# EAGLE board picopter_tx (EAGLE 6.5.0)
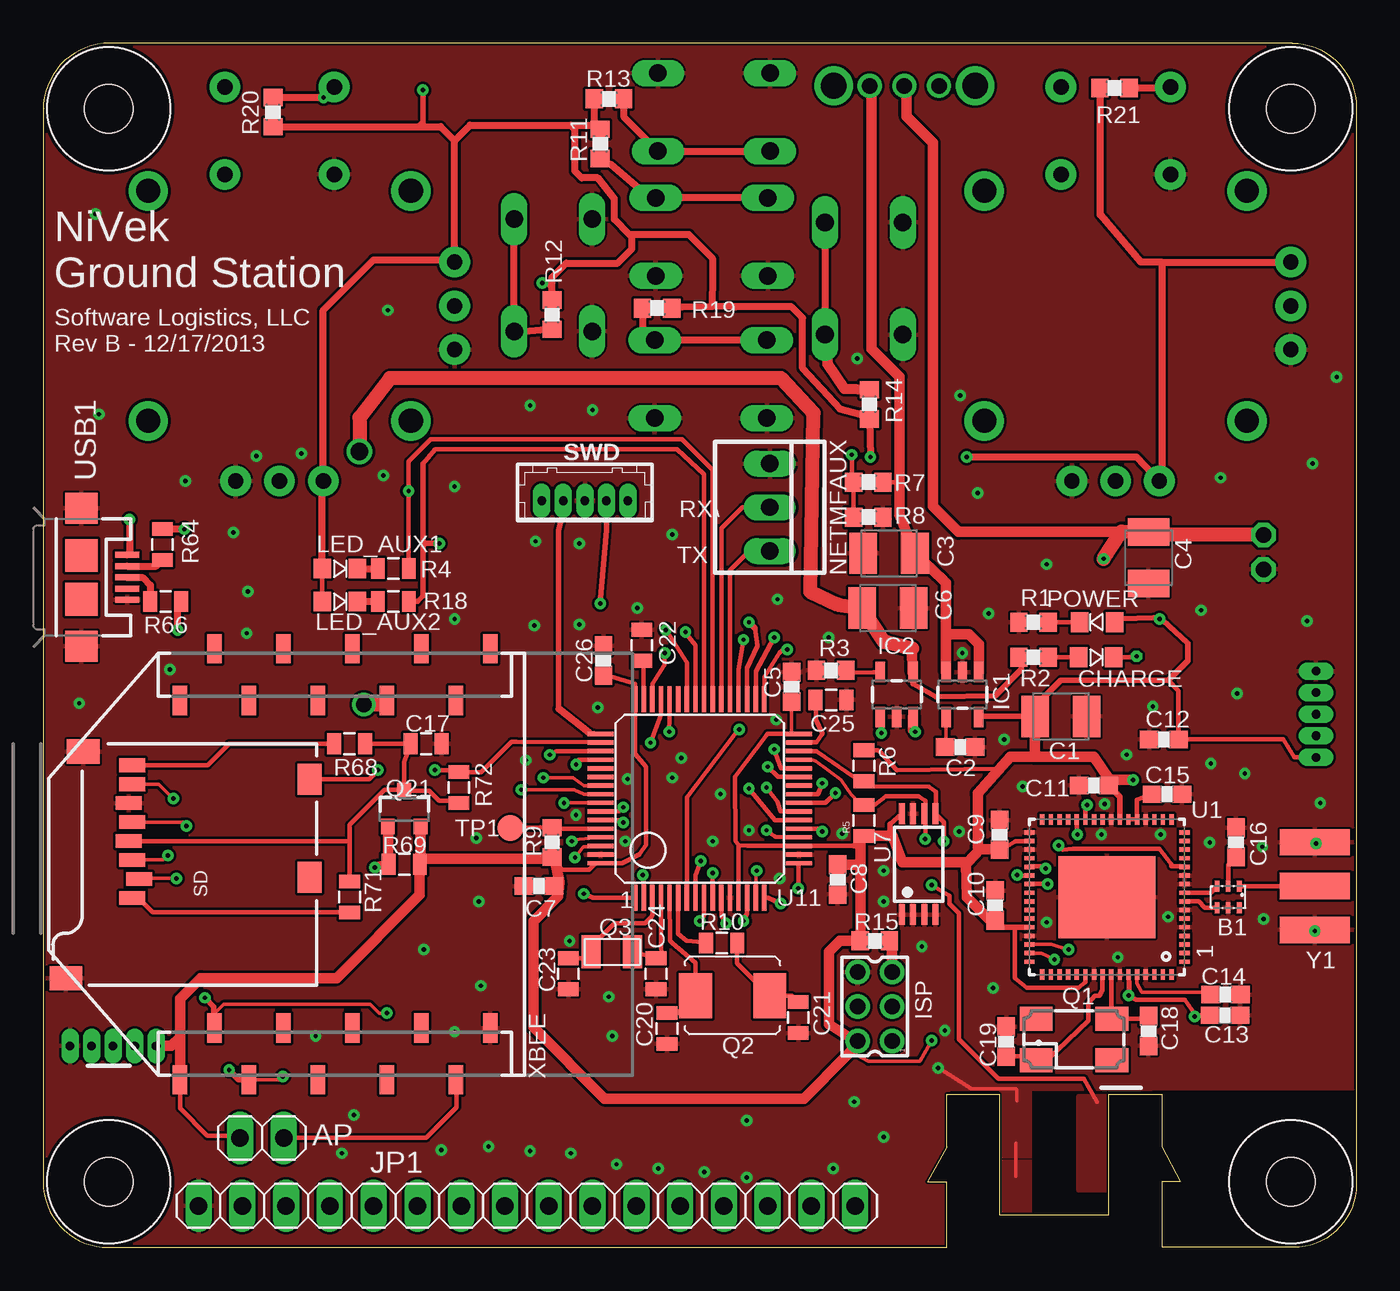
[diagram p0: board, top side]
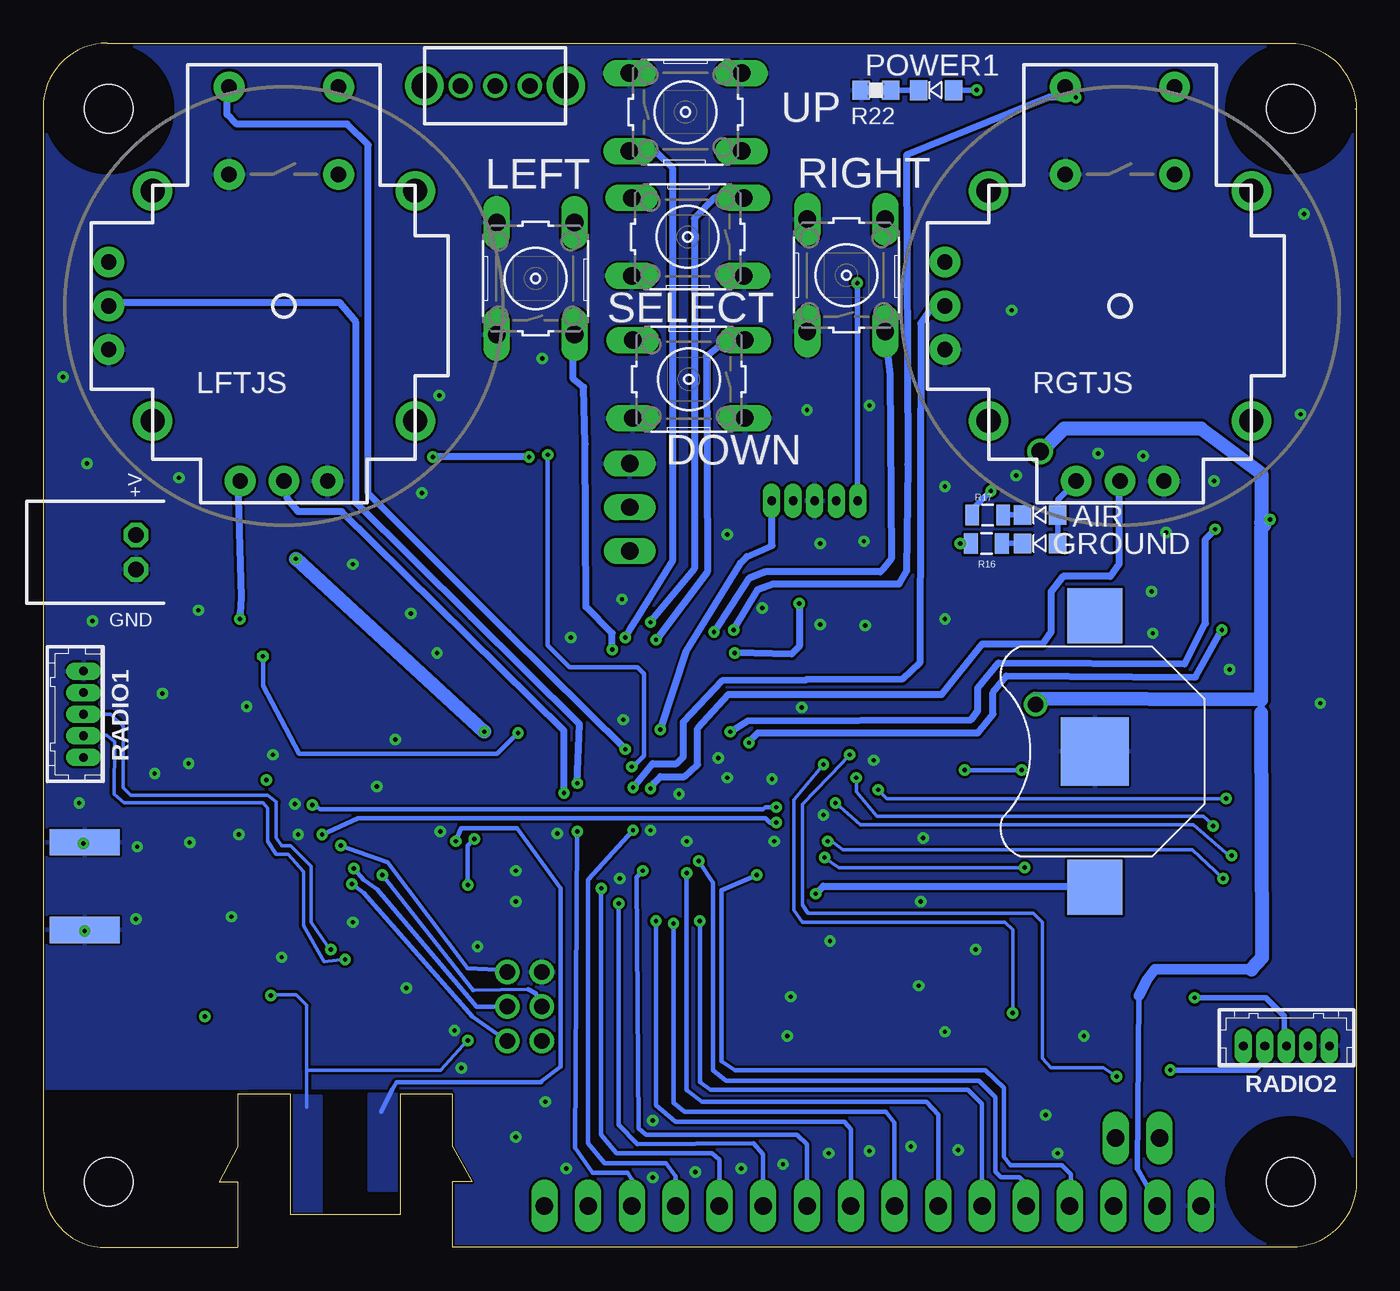
[diagram p1: board, bottom side, seen from below]

Size 76.2 x 69.85 mm. Coordinates in mm from the lower left corner, seen from the top.
Outline: 0,3.79 arc90 3.79,0 52.45,0 52.45,3.81 51.31,3.81 52.45,5.84 52.45,8.89 55.5,8.89 55.5,1.91 61.85,1.91 61.85,8.89 64.9,8.89 64.9,5.84 65.98,3.81 64.91,3.81 64.91,0 72.56,0 arc90 76.2,3.64 76.2,66.12 arc90 72.47,69.85 3.86,69.85 arc90 0,65.99
Outline: 0.06,66.04 0,66.04 0,3.68
Copper layers (1*16): Top 0.035mm / dielectric 1.5mm / Bottom 0.035mm
Design rules "default *": minimum track width 8mil, minimum drill 1mil, track to track 6mil, track to pad 6mil, pad to pad 6mil, via to via 6mil, smd to smd 0mil, copper to edge 5mil, drill to drill 8mil, minimum pad ring 10mil, minimum via ring 8mil, stop-mask expansion 4mil, vias tented up to drill 11mil, thermal gap 5mil
tRestrict: 5 lines

## Footprints (pad centres in the part's own frame; a part is rotated, then mirrored left to right if it is on the bottom)
LED0805 = smd 1.143 x 1.016: C 0,1.016; P$1 0,-1.016
1X02 = drill 1.016 long: 1 -1.27,0; 2 1.27,0
BALUN = smd 0.27 x 0.635: 1 -0.7,-0.616; 2 -0.05,-0.616; 3 0.6,-0.616; 4 0.6,0.616; 5 -0.05,0.616; 6 -0.7,0.616
BATTCON_12MM = smd 3.962 x 3.962: GND 0,0 | smd 3.175 x 3.175: PWR@1 -7.874,0; PWR@2 7.874,0
JST-PH-2-90 = drill 0.9 pad 1.422 octagon: N -1,0; P 1,0
SMC_B = smd 1.6 x 2.4: + -1.5,0; - 1.5,0
C0603 = smd 1.1 x 1: 1 -0.85,0; 2 0.85,0
0805 = smd 0.8 x 1.2: 1 -0.9,0; 2 0.9,0
B3F-10XX = drill 1.016 long: 1 -3.251,2.261; 2 3.251,2.261; 3 -3.251,-2.261; 4 3.251,-2.261
HOLE-4-40 = hole 2.794: 0,0
SOT23-5 = smd 0.55 x 1.2: 1 -0.95,-1.3; 2 0,-1.3; 3 0.95,-1.3; 4 0.95,1.3; 5 -0.95,1.3
87758-0616 = drill 0.9 pad 1.27: 1 -2,-1; 2 -2,1; 3 0,-1; 4 0,1; 5 2,-1; 6 2,1
1X16 = drill 1.016 long: 1 -19.05,0; 2 -16.51,0; 3 -13.97,0; 4 -11.43,0; 5 -8.89,0; 6 -6.35,0; 7 -3.81,0; 8 -1.27,0; 9 1.27,0; 10 3.81,0; 11 6.35,0; 12 8.89,0; 13 11.43,0; 14 13.97,0; 15 16.51,0; 16 19.05,0
JOYSTICK = drill 0.9 pad 1.778: B1A -3.175,12.7; B1B 3.175,12.7; B2A -3.175,7.62; B2B 3.175,7.62 | drill 0.889 pad 1.778: H1 -2.54,-10.16; H2 0,-10.16; H3 2.54,-10.16; V1 -10.16,2.54; V2 -10.16,0; V3 -10.16,-2.54 | drill 1.397 pad 2.286: MOUNT1 -7.62,6.668; MOUNT2 -7.62,-6.668; MOUNT3 7.62,-6.668; MOUNT4 7.62,6.668
22-23-2031 = drill 1 long: 1 -2.54,0; 2 0,0; 3 2.54,0
CTS406 = smd 1.9 x 1.4: 1 -2.2,-1.2; 2 2.2,-1.2; 3 2.2,1.2; 4 -2.2,1.2
ABRACON_ABM7_CERAMIC_XTAL = smd 1.9 x 2.6: P$1 -2.15,0; P$2 2.15,0
CRYSTAL-EXC-31B = smd 1.1 x 1.9: P$1 -1.225,0; P$2 1.175,0
SOT23-3 = smd 0.8 x 0.9: 1 -0.95,-1; 2 0.95,-1; 3 0,1.1
R0603 = smd 1 x 1.1: 1 -0.85,0; 2 0.85,0
DF13-5P-1.25DSA = drill 0.5 pad 0.8 long: 1 -2.5,0; 2 -1.25,0; 3 0,0; 4 1.25,0; 5 2.5,0
SWITCH-SPDT-CNK-OS2 = drill 0.9: 1 0,2.007; 2 0,0; 3 0,-2.007 | drill 1.499 pad 1.905: P$4 0,4.102; P$5 0,-4.102
MICRO-SD-SOCKET-PP = smd 0.8 x 1.5: 1 -8.94,10.7; 2 -7.84,10.3; 3 -6.74,10.7; 4 -5.64,10.9; 5 -4.54,10.7; 6 -3.44,10.9; 7 -2.34,10.7; 8 -1.24,10.7 | smd 1.8 x 1.4: CD1 -2.05,0.4; CD2 -7.75,0.4 | smd 1.4 x 1.9: GND1 -13.6,14.55; GND3 -0.45,13.55
TP15R = smd 1.5 x 1.5: TP 0,0
QFN-64 = smd 0.6 x 0.25: 1 -4.5,3.75; 2 -4.5,3.25; 3 -4.5,2.75; 4 -4.5,2.25; 5 -4.5,1.75; 6 -4.5,1.25; 7 -4.5,0.75; 8 -4.5,0.25; 9 -4.5,-0.25; 10 -4.5,-0.75; 11 -4.5,-1.25; 12 -4.5,-1.75; 13 -4.5,-2.25; 14 -4.5,-2.75; 15 -4.5,-3.25; 16 -4.5,-3.75; 33 4.5,-3.75; 34 4.5,-3.25; 35 4.5,-2.75; 36 4.5,-2.25; 37 4.5,-1.75; 38 4.5,-1.25; 39 4.5,-0.75; 40 4.5,-0.25; 41 4.5,0.25; 42 4.5,0.75; 43 4.5,1.25; 44 4.5,1.75; 45 4.5,2.25; 46 4.5,2.75; 47 4.5,3.25; 48 4.5,3.75 | smd 0.25 x 0.6: 17 -3.75,-4.5; 18 -3.25,-4.5; 19 -2.75,-4.5; 20 -2.25,-4.5; 21 -1.75,-4.5; 22 -1.25,-4.5; 23 -0.75,-4.5; 24 -0.25,-4.5; 25 0.25,-4.5; 26 0.75,-4.5; 27 1.25,-4.5; 28 1.75,-4.5; 29 2.25,-4.5; 30 2.75,-4.5; 31 3.25,-4.5; 32 3.75,-4.5; 49 3.75,4.5; 50 3.25,4.5; 51 2.75,4.5; 52 2.25,4.5; 53 1.75,4.5; 54 1.25,4.5; 55 0.75,4.5; 56 0.25,4.5; 57 -0.25,4.5; 58 -0.75,4.5; 59 -1.25,4.5; 60 -1.75,4.5; 61 -2.25,4.5; 62 -2.75,4.5; 63 -3.25,4.5; 64 -3.75,4.5 | smd 5.639 x 4.75: PAD 0,0
TSSOP8 = smd 0.35 x 1.2: 1 -0.975,-2.925; 2 -0.325,-2.925; 3 0.325,-2.925; 4 0.975,-2.925; 5 0.975,2.925; 6 0.325,2.925; 7 -0.325,2.925; 8 -0.975,2.925
LQFP64 = smd 0.25 x 1.5: 1 -3.75,-5.75; 2 -3.25,-5.75; 3 -2.75,-5.75; 4 -2.25,-5.75; 5 -1.75,-5.75; 6 -1.25,-5.75; 7 -0.75,-5.75; 8 -0.25,-5.75; 9 0.25,-5.75; 10 0.75,-5.75; 11 1.25,-5.75; 12 1.75,-5.75; 13 2.25,-5.75; 14 2.75,-5.75; 15 3.25,-5.75; 16 3.75,-5.75; 33 3.75,5.75; 34 3.25,5.75; 35 2.75,5.75; 36 2.25,5.75; 37 1.75,5.75; 38 1.25,5.75; 39 0.75,5.75; 40 0.25,5.75; 41 -0.25,5.75; 42 -0.75,5.75; 43 -1.25,5.75; 44 -1.75,5.75; 45 -2.25,5.75; 46 -2.75,5.75; 47 -3.25,5.75; 48 -3.75,5.75 | smd 1.5 x 0.25: 17 5.75,-3.75; 18 5.75,-3.25; 19 5.75,-2.75; 20 5.75,-2.25; 21 5.75,-1.75; 22 5.75,-1.25; 23 5.75,-0.75; 24 5.75,-0.25; 25 5.75,0.25; 26 5.75,0.75; 27 5.75,1.25; 28 5.75,1.75; 29 5.75,2.25; 30 5.75,2.75; 31 5.75,3.25; 32 5.75,3.75; 49 -5.75,3.75; 50 -5.75,3.25; 51 -5.75,2.75; 52 -5.75,2.25; 53 -5.75,1.75; 54 -5.75,1.25; 55 -5.75,0.75; 56 -5.75,0.25; 57 -5.75,-0.25; 58 -5.75,-0.75; 59 -5.75,-1.25; 60 -5.75,-1.75; 61 -5.75,-2.25; 62 -5.75,-2.75; 63 -5.75,-3.25; 64 -5.75,-3.75
USB-MICROB = smd 0.35 x 1.4: D+ 0,2.65; D- -0.65,2.65; GND 1.3,2.65; ID 0.65,2.65; VBUS -1.3,2.65 | smd 1.8 x 1.9: MT1 -4,0; MT2 4,0 | smd 1.9 x 1.9: P$1 -1.27,0; P$2 1.27,0
XBEE-SMD = smd 1.7 x 0.85: 1 -12.5,20; 2 -9.5,18; 3 -12.5,16; 4 -9.5,14; 5 -12.5,12; 6 -9.5,10; 7 -12.5,8; 8 -9.5,6; 9 -12.5,4; 10 -9.5,2; 11 12.5,2; 12 9.5,4; 13 12.5,6; 14 9.5,8; 15 12.5,10; 16 9.5,12; 17 12.5,14; 18 9.5,16; 19 12.5,18; 20 9.5,20
SMA-EDGE = smd 1.524 x 4.064: GND@0 0,0; GND@1 5.08,0; SIG 2.54,0 | smd 1.524 x 4.064 bottom: GND@2 0,0; GND@3 5.08,0

## Placement (x,y rotation side)
AIR  BLUE  [LED0805]  18.35,42.48 90 bottom
AP  [1X02]  12.7,6.35 0 top
B1  BALUN0805  [BALUN]  68.71,20.32 180 top
BAT1  [BATTCON_12MM]  15.18,28.77 90 bottom
BATT2  BATT-CONNJST-PH-90  [JST-PH-2-90]  70.8,40.32 90 bottom
C1  10uF  [SMC_B]  59.05,30.8 0 top
C2  470pF  [C0603]  53.21,29.02 0 top
C3  220uF  [SMC_B]  49.09,40.26 180 top
C4  4.7uF  [SMC_B]  64.14,40.01 270 top
C5  0.1uF  [C0603]  43.43,32.51 90 top
C6  4.7uF  [SMC_B]  49.02,37.08 0 top
C7  0.1uF  [C0603]  28.77,20.95 180 top
C8  0.1uF  [C0603]  46.1,21.34 270 top
C9  0.1uf  [C0603]  55.5,23.94 90 top
C10  0.1uf  [C0603]  55.24,19.84 90 top
C11  0.1uf  [C0603]  60.96,26.8 180 top
C12  0.1uf  [C0603]  65.02,29.46 180 top
C13  0.1uf  [C0603]  68.58,13.46 0 top
C14  1uF  [C0603]  68.61,14.67 0 top
C15  1uF  [C0603]  65.21,26.29 0 top
C16  22pF  [C0603]  69.22,23.5 90 top
C17  0.1uF  [0805]  22.23,29.21 0 top
C18  10pF  [C0603]  64.14,12.55 270 top
C19  10pF  [C0603]  55.88,11.94 90 top
C20  18pf  [0805]  36.2,12.7 270 top
C21  18pf  [0805]  43.81,13.34 270 top
C22  2.2uF  [0805]  34.73,34.92 90 top
C23  6pf  [0805]  30.48,15.88 270 top
C24  6pf  [0805]  35.56,15.88 270 top
C25  2.2uF  [0805]  45.72,31.75 0 top
C26  0.1uF  [C0603]  32.51,34.04 90 top
CHARGE  GREEN  [LED0805]  61.09,34.23 270 top
DOWN  Reset  [B3F-10XX]  38.73,50.36 180 bottom
DRILL1  [HOLE-4-40]  3.81,3.81 0 top
DRILL2  [HOLE-4-40]  72.39,3.81 0 top
DRILL3  [HOLE-4-40]  3.81,66.04 0 top
DRILL4  [HOLE-4-40]  72.39,66.04 0 top
GROUND  BLUE  [LED0805]  18.35,40.83 90 bottom
IC1  Vreg 3V3  [SOT23-5]  53.34,32.07 180 top
IC2  MCP-LI-CHARGER-1  [SOT23-5]  49.53,32.07 0 top
ISP  87758-0616  [87758-0616]  48.26,13.97 90 top
JP1  [1X16]  28.07,2.41 0 top
LED_AUX1  BLUE  [LED0805]  17.21,39.37 270 top
LED_AUX2  BLUE  [LED0805]  17.21,37.47 270 top
LEFT  Reset  [B3F-10XX]  47.62,56.2 90 bottom
LFTJS  JOYSTICKPTH  [JOYSTICK]  62.23,54.61 0 bottom
NETMFAUX  22-23-2031  [22-23-2031]  42.16,42.93 270 top
POWER  BLUE  [LED0805]  61.15,36.26 90 top
POWER1  BLUE  [LED0805]  24.38,67.12 90 bottom
Q1  16MHz  [CTS406]  59.82,12.06 0 top
Q2  ABRACON_ABM7  [ABRACON_ABM7_CERAMIC_XTAL]  40.01,14.61 0 top
Q3  XTAL-ECX-31B  [CRYSTAL-EXC-31B]  33.02,17.14 0 top
Q21  MOSFET-PCHANNELSMD  [SOT23-3]  20.95,25.4 0 top
R1  1K  [R0603]  57.47,36.26 0 top
R2  1K  [R0603]  57.47,34.23 0 top
R3  3K  [R0603]  45.72,33.47 180 top
R4  470  [0805]  20.32,39.37 180 top
R5  10K  [0805]  47.62,24.77 90 top
R6  10k  [0805]  47.62,27.94 270 top
R7  10K  [R0603]  47.88,44.39 180 top
R8  10K  [R0603]  47.88,42.35 0 top
R9  4K7  [R0603]  29.53,23.5 270 top
R10  390  [0805]  39.37,17.65 0 top
R11  10K  [R0603]  32.32,64.01 270 top
R12  10K  [R0603]  29.53,54.1 270 top
R13  10K  [R0603]  32.83,66.61 0 top
R14  10K  [R0603]  47.94,48.9 90 top
R15  10K  [R0603]  48.26,17.78 0 top
R16  470  [0805]  21.46,40.83 0 bottom
R17  470  [0805]  21.4,42.48 0 bottom
R18  470  [0805]  20.32,37.47 180 top
R19  10K  [R0603]  35.62,54.48 180 top
R20  10K  [R0603]  13.34,65.85 90 top
R21  10K  [R0603]  62.17,67.25 0 top
R22  1K  [R0603]  27.88,67.12 0 bottom
R64  33  [0805]  6.92,40.77 90 top
R66  33  [0805]  7.11,37.47 0 top
R68  10K  [0805]  17.78,29.21 180 top
R69  10K  [0805]  20.95,22.23 0 top
R71  10K  [0805]  17.78,20.32 270 top
R72  10K  [0805]  24.13,26.67 270 top
RADIO1  DF13-5P-1.25DSA  [DF13-5P-1.25DSA]  73.85,30.92 90 bottom
RADIO2  DF13-5P-1.25DSA  [DF13-5P-1.25DSA]  4.06,11.68 0 bottom
RGTJS  JOYSTICKPTH  [JOYSTICK]  13.72,54.61 0 bottom
RIGHT  Reset  [B3F-10XX]  29.59,56.39 90 bottom
S1  SWITCH-PWR-CNKOS2  [SWITCH-SPDT-CNK-OS2]  49.97,67.37 270 bottom
SD  USD-SOCKETNEW  [MICRO-SD-SOCKET-PP]  15.88,29.21 90 top
SELECT  Reset  [B3F-10XX]  38.8,58.61 180 bottom
SWD  DF13-5P-1.25DSA  [DF13-5P-1.25DSA]  31.43,43.31 0 top
TP1  TPTP15R  [TP15R]  27.11,24.32 0 top
U1  ATMEGA128RFA1  [QFN-64]  61.72,20.32 180 top
U7  24AA128ST  [TSSOP8]  50.8,22.23 0 top
U11  STM32F40X  [LQFP64]  38.1,26.04 0 top
UP  Reset  [B3F-10XX]  38.93,65.85 0 bottom
USB1  USB-MICROB  [USB-MICROB]  2.22,38.86 270 top
XBEE  XBEE-1B3  [XBEE-SMD]  27.94,22.23 90 top
Y1  SMA_EDGE  [SMA-EDGE]  73.79,18.41 90 top

## Library data of the parts
AIR CHARGE GROUND LED_AUX1 LED_AUX2 POWER POWER1 Q3 = SoftwareLogisticsParts
AP JP1 = pinhead
B1 BATT2 DRILL1-DRILL4 IC1 IC2 S1 U1 Y1 = palmquad_alpha
BAT1 = SparkFun-Electromechanical
C1-C16 C18 C19 C26 R1-R3 R7-R9 R11-R15 R19-R22 = rcl
C17 = SparkFun-Capacitors
C20-C25 R4-R6 R10 R16-R18 = SparkFun-Passives
DOWN LEFT RIGHT SELECT UP = switch-omron
ISP = con-molex; MPN: 87758-0616; OC_FARNELL: 7472323; OC_NEWARK: 25M5667
LFTJS RGTJS = SparkFun
NETMFAUX = con-molex; MF: MOLEX; MPN: 22-23-2031; OC_FARNELL: 1462950; OC_NEWARK: 30C0862
Q1 = palmquad_alpha; OC_FARNELL: unknown; OC_NEWARK: unknown
Q2 = Nwazet.Go
Q21 = SparkFun-DiscreteSemi
R64 R66 R68 R69 R71 R72 = SparkFun-Resistors
RADIO1 RADIO2 SWD = pixhawk2
SD = SparkFun-Connectors
TP1 = testpad
U7 = microchip; MF: MICROCHIP; MPN: 24AA128-I/ST; OC_FARNELL: unknown; OC_NEWARK: 92C6843
U11 = GHI
USB1 = SparkFun-Connectors; PROD_ID: CONN-09505
XBEE = SparkFun-RF

## Nets
!PWR_SD_CTL: Q21.1 R69.1 U11.62
!SD_CS: SD.2 U11.61
!SD_INSERT: R72.1 SD.CD1 U11.50
+3V3 [power]: AIR.P$1 AP.1 C1.+ C5.1 C7.1 C8.1 C9.1 C10.1 C11.1 C12.1 C13.1 C26.1 GROUND.P$1 IC1.5 ISP.2 LED_AUX1.P$1 LED_AUX2.P$1 LFTJS.H1 LFTJS.V1 POWER1.P$1 POWER.P$1 Q21.2 R5.1 R6.1 R9.2 R11.1 R12.1 R13.1 R14.1 R15.1 R19.1 R20.1 R21.1 R69.2 RADIO1.1 RADIO2.1 RGTJS.H1 RGTJS.V1 SWD.1 U1.23 U1.34 U1.44 U1.54 U1.59 U7.8 U11.13 U11.19 U11.32 U11.48 U11.64 XBEE.1
+5V: C6.+ IC2.4 JP1.2 R2.1 USB1.VBUS XBEE.14
AT_CONSOLE_IN: RADIO1.3 U1.46
AT_CONSOLE_OUT: RADIO1.2 U1.47
AT_RESET: ISP.5 R15.2 U1.12
F4_CONSOLE_IN: NETMFAUX.2 U11.38
F4_CONSOLE_OUT: NETMFAUX.3 U11.37
FROM_STM: U1.27 U11.58
GND: B1.5 BAT1.GND BATT2.N C1.- C2.2 C3.- C4.- C5.2 C6.- C7.2 C8.2 C9.2 C10.2 C11.2 C12.2 C13.2 C14.2 C15.2 C16.2 C17.2 C18.2 C19.2 C20.2 C21.2 C22.2 C23.2 C24.2 C25.2 C26.2 DOWN.1 DOWN.2 IC1.2 IC2.2 ISP.6 JP1.1 LEFT.1 LEFT.2 LFTJS.B2A LFTJS.H3 LFTJS.V3 NETMFAUX.1 R1.1 R3.2 R8.2 R22.1 RADIO1.5 RADIO2.5 RGTJS.B2A RGTJS.H3 RGTJS.V3 RIGHT.1 RIGHT.2 SD.6 SD.GND1 SD.GND3 SELECT.1 SELECT.2 SWD.3 U1.5 U1.7 U1.10 U1.11 U1.20 U1.24 U1.33 U1.35 U1.45 U1.55 U1.58 U1.61 U1.PAD U7.1 U7.2 U7.3 U7.4 U7.7 U11.12 U11.18 U11.63 UP.1 UP.2 USB1.GND USB1.MT1 USB1.MT2 XBEE.10 Y1.GND@0 Y1.GND@1 Y1.GND@2 Y1.GND@3
I2C2_SCL: R5.2 U7.6 U11.29
I2C2_SDA: R6.2 U7.5 U11.30
JSL_HORIZ: LFTJS.H2 U11.24
JSL_VERT: LFTJS.V2 U11.25
JSR_HORIZ: RGTJS.H2 U11.22
JSR_VERT: RGTJS.V2 U11.23
LCD_CS: JP1.6 U11.9
LCD_DAT0: JP1.7 U11.10
LCD_DAT1: JP1.8 U11.11
LCD_DAT2: JP1.9 U11.14
LCD_DAT3: JP1.10 U11.15
LCD_DAT4: JP1.11 U11.16
LCD_DAT5: JP1.12 U11.17
LCD_DAT6: JP1.13 U11.20
LCD_DAT7: JP1.14 U11.21
LCD_RS: JP1.4 U11.2
LCD_RW: JP1.5 U11.8
LED_DRONE: R4.1 R17.1 U11.39
LED_GROUND: R16.1 R18.1 U11.40
MISO: ISP.1 U1.39
MOSI: ISP.4 U1.38
N$1: CHARGE.C IC2.1
N$2: CHARGE.P$1 R2.2
N$4: AIR.C R17.2
N$5: LED_AUX1.C R4.2
N$6: U1.14
N$7: U1.15
N$8: U1.16
N$9: POWER.C R1.2
N$10: B1.2 C16.1
N$11: IC2.5 R3.1
N$12: GROUND.C R16.2
N$14: R9.1 TP1.TP U11.60
N$15: POWER1.C R22.2
N$16: R10.1 U11.6
N$17: LED_AUX2.C R18.2
N$19: C22.1 U11.47
N$20: C25.1 U11.31
N$25: C2.1 IC1.4
N$26: C15.1 U1.21 U1.22
N$27: C14.1 U1.60
N$28: B1.1 Y1.SIG
N$29: B1.3 U1.9
N$30: B1.4 U1.8
N$33: C18.1 Q1.3 U1.57
N$34: C19.1 Q1.1 U1.56
N$68: R68.2 SD.8
N$69: R71.2 SD.1
N$92: R64.1 USB1.D-
N$93: R66.1 USB1.D+
OSC32_MHZ_IN: C23.1 Q3.P$1 U11.3
OSC32_MHZ_OUT: C24.1 Q3.P$2 U11.4
PWR_SD_CARD: C17.1 Q21.3 R68.1 R71.1 R72.2 SD.4
RESET: SWD.5 U11.7
SCK: ISP.3 U1.37
SD_MISO: SD.7 U11.56
SD_MOSI: SD.3 U11.57
SD_SCK: SD.5 U11.55
SW_DOWN: DOWN.3 DOWN.4 R19.2 U11.36
SW_JSL: LFTJS.B1A R21.2 U11.28
SW_JSR: R20.2 RGTJS.B1A U11.42
SW_LEFT: LEFT.3 LEFT.4 R14.2 U11.33
SW_RIGHT: R12.2 RIGHT.3 RIGHT.4 U11.41
SW_SELECT: R11.2 SELECT.3 SELECT.4 U11.35
SW_UP: R13.2 U11.34 UP.3 UP.4
SWCLK: SWD.2 U11.49
SWDIO: SWD.4 U11.46
TO_STM: U1.28 U11.59
USART2_WIFI_CTS: XBEE.16
USART2_WIFI_RTS: XBEE.12
USB_DM: R64.2 U11.44
USB_DP: R66.2 U11.45
VBACKBATT: BAT1.PWR@1 U11.1
VBATT: C3.+ IC1.1 IC1.3 R7.1 S1.1
VBATT_ADC: R7.2 R8.1 U11.27
VBATT_IN: BATT2.P C4.+ IC2.3 S1.2
WIFI_RESET: XBEE.5
WIFI_RX: RADIO2.3 U11.52 XBEE.2
WIFI_TX: RADIO2.2 U11.51 XBEE.3
WIFLY_AP: AP.2 XBEE.9
XTAL3: C20.1 Q2.P$1 U11.5
XTAL4: C21.1 Q2.P$2 R10.2

## Tracks (layer width: path | path; a pad name or v marks a point on that pad's centre or on a via)
!PWR_SD_CTL  (via drill 0.25)
  Top 0.203: v30.86,22.61 31.3,23.18 31.37,23.24 32.31,23.24 U11.62
  Top 0.254: 20,22.27 R69.1
  Top 0.61: Q21.1 20,22.27 | R69.1 v19.24,22.04
  Bottom 0.203: v19.24,22.04 30.04,22.04 v30.86,22.61
!SD_CS  (via drill 0.25)
  Top 0.203: U11.61 30.77,23.66 v30.67,23.56 | v7.75,21.4 5.6,21.4 SD.2
  Bottom 0.203: v30.67,23.56 30.61,23.69 29.78,23.05 9.53,23.05 v7.75,21.4
!SD_INSERT  (via drill 0.25)
  Top 0.254: SD.CD1 18.91,27.16 v19.43,27.69 | v22.73,27.69 24.01,27.69 R72.1 25.41,27.57 27.18,29.34 27.47,29.34 U11.50
  Bottom 0.254: v19.43,27.69 v22.73,27.69
+3V3  (via drill 0.25)
  Top 0.203: 32.88,33.13 C26.1 | C5.1 43.43,29.91 43.31,29.79 | 29.95,21.19 C7.1 | ISP.2 47.18,11.89 47.18,11.18 47.88,10.79 50.86,10.79 v51.56,12 | v66.8,13.4 67.69,13.36 | 67.53,13.44 67.63,13.46 67.75,13.08 67.75,13.76 C13.1 | U1.59 62.97,14.9 v62.99,14.61 | 62.13,27.11 C11.1
  Top 0.254: U11.13 40.35,23.33 | 40.35,23.33 40.83,23.3 41.01,23.3 U11.19 47.05,23.29 | 21.91,22.27 R69.2 21.84,22.21 | 29.17,22.54 R9.2 29.89,21.9 31.69,21.91 32.06,22.29 U11.64 33.59,22.29 34.61,22.8 34.99,23.37 34.98,27.88 34.35,28.64 U11.48 34.34,32.69 32.88,33.13 | 40.35,23.33 40.16,23.59 40.13,27.3 41.97,29.72 42.04,29.78 42.1,29.79 43.31,29.79 U11.32 | C9.1 55.54,23.03 55.56,23.11 55.69,23.05 55.82,23.18 56.41,23.56 U1.34 | 49.15,24.56 U7.8 | 54.23,26.35 54.23,26.29 55.37,27.75 49.53,27.69 48.51,28.77 48.44,28.84 R6.1 | 54.23,23.22 54.36,23.09 | C10.1 54.93,18.99 | 53.53,22.26 53.66,22.33 | 65.28,32.89 65.87,32.3 C12.1 71.94,29.46 72.6,28.42 RADIO1.1 | ISP.2 47.15,11.97 | XBEE.1 7.94,8.06 9.53,6.48 11.3,6.48 AP.1 | U1.54 60.47,15.39 60.07,15.05 57.09,15.05 56.39,15.62 56.39,18.57 | C13.1 66.84,13.49 | 66.84,13.49 66.23,14.35 63.44,14.35 63.06,14.54 62.99,15.8 U1.59 | 29.59,20.93 C7.1 | LED_AUX2.P$1 LED_AUX1.P$1 | POWER.P$1 61.91,36.32 62.48,36.45 | 66.84,13.49 66.84,13.44 v66.8,13.4
  Top 0.305: IC1.5 54.32,30.8 C1.+ 57.55,31.39 59.05,32.89 65.28,32.89 66.42,34.04 66.42,35.05 64.96,36.39 | 64.96,36.39 64.45,36.51 62.48,36.45 | 57.55,28.55 57.53,28.45 | 61.85,27.18 61.85,26.45 C11.1 62.47,26.14 U1.23 | U1.44 56.39,18.57 55.66,18.57 C10.1 | v64.77,36.45 64.96,36.39 | 64.96,44.64 LFTJS.H1 | 47.05,23.29 47.33,23.29 47.41,23.37 | 49.15,24.56 49.15,23.88 | v28.96,55.94 29.27,55.94 29.53,55.69 | v22.04,67.12 22.04,65.25 21.78,65
  Top 0.406: R13.1 31.98,65.2 R11.1 32.09,65.09 30.61,65.09 | 23.88,64.2 RGTJS.V1 23.75,57.28 19.18,57.28 16.26,54.36 RGTJS.H1 16.19,44.39 LED_AUX1.P$1 | 23.88,64.2 24.77,65.09 30.61,65.09 | R20.1 21.78,65 23.07,65 23.88,64.2 | v48.01,45.85 R14.1 47.85,48.2 46.23,48.64 44.07,50.99 44.07,53.91 43.43,54.55 40.2,54.55 38.83,54.58 | v53.59,45.85 63.44,45.85 LFTJS.H1 | 64.9,57.15 64.9,45.21 64.96,44.64 | 64.9,57.15 63.69,57.15 61.34,59.88 61.34,66.95 R21.1 | C26.1 32.61,33.19 | 64.9,57.15 LFTJS.V1 | R19.1 36.54,54.55 37.08,54.55 38.83,54.58 | 38.83,54.58 38.86,56.33 38.86,57.34 37.47,58.74 34.04,58.74 | 34.04,58.74 33.15,59.63 33.15,60.83 32.19,62.04 31.24,62.04 30.86,62.42 30.86,64.83 30.61,65.09 | R12.1 29.53,55.69 29.53,56.26 30.35,57.09 33.34,57.09 34.16,57.91 34.16,58.61 34.04,58.74
  Top 0.61: Q21.2 21.91,22.27 | R69.2 21.91,22.54 29.17,22.54 | C1.+ 57.55,28.55 | 61.85,27.18 60.96,28.45 57.53,28.45 56.13,28.45 54.23,26.35 | C9.1 54.36,23.09 53.66,22.33 49.87,22.33 49.28,23.88 49.15,23.88 47.64,23.88 R5.1 47.41,23.65 47.41,23.37 47.41,22.29 | 54.23,26.29 54.23,23.22 | 54.93,18.99 53.59,20.32 53.53,22.26 | 47.15,11.97 45.59,12.95 45.59,17.14 46.23,17.78 R15.1 47.41,22.29 | XBEE.1 7.94,12.19 | 7.94,12.19 7.94,14.42 9.14,15.62 17.02,15.62 21.84,20.45 21.84,22.21 | v63.25,27.11 62.13,27.11 | RADIO2.1 7.43,11.68 7.94,12.19 | ISP.2 46.99,11.51 46.61,11.11 44.13,8.64 32.58,8.64 28.45,12.76 28.45,18.92 29.89,20.36 29.95,21.19 29.7,22.41 29.89,21.9 | C8.1 47.31,22.19 47.41,22.29
  Bottom 0.203: 63.12,26.99 v63.25,27.11 | v51.56,12 53.15,10.29 60.9,10.29 | 60.9,10.29 60.9,8.13 | 60.9,10.29 60.9,14.03 61.53,14.67 62.93,14.67 v62.99,14.61
  Bottom 0.305: 64.9,44.45 LFTJS.H1 | SWD.1 28.96,43.28 v28.96,55.94 | POWER1.P$1 v22.04,67.12 | RGTJS.H1 17.34,43.37 AIR.P$1 GROUND.P$1
  Bottom 0.406: v48.01,45.85 v53.59,45.85 | 64.9,44.45 64.71,37.72 64.77,36.77 v64.77,36.45
  pour Bottom: 60.07,8.76 60.07,2.03 61.72,2.03 61.72,8.83
+5V  (via drill 0.25, 0.9, 1)
  Top 0.305: 50.45,33.37 IC2.4 50.48,32.7 51.82,31.94 55.24,32 56.77,33.53 56.77,34.08 R2.1
  Top 0.406: v5.02,42.23 5.02,40.31 USB1.VBUS | 19.79,31.5 XBEE.14
  Top 0.61: 50.45,33.37 50.42,34.73 | 19.96,31.75 XBEE.14
  Top 0.813: 50.42,34.73 48.79,35.12 C6.+ 46.12,37.27 44.51,38.04 44.7,48.39 42.8,50.42 20.13,50.42 18.35,48.13 v18.35,46.16 | v18.61,31.5 19.79,31.5
  Bottom 0.203: JP1.2 11.49,2.41
  Bottom 0.305: 11.49,2.41 12.7,4.57 12.64,14.61
  Bottom 0.406: 5.52,41.72 5.37,41.88 v5.02,42.23 | 5.52,30.99 5.52,31.75 | 18.67,31.81 v18.61,31.5
  Bottom 0.61: 12.64,14.61 12.13,15.56 11.68,16.13 6.1,16.13
  Bottom 0.813: 6.1,16.13 5.46,16.83 5.46,17.14 5.52,30.99 | 5.52,41.72 5.52,31.75 18.67,31.81 | v18.35,46.16 18.29,46.16 16.95,47.5 9.02,47.5 5.52,44.9 5.52,42.04 5.37,41.88
AT_CONSOLE_IN  (via drill 0.25)
  Top 0.203: U1.46 58.5,17.57 v59.5,17.27
  Bottom 0.203: v59.5,17.27 59.69,17.46 60.64,18.86 60.64,22.1 61.85,23.3 62.36,23.3 62.67,23.75 62.67,25.84 63.18,26.23 71.12,26.23 71.56,26.67 71.56,30.23 72.26,30.92 RADIO1.3
AT_CONSOLE_OUT  (via drill 0.25)
  Top 0.203: U1.47 57.92,17.07 v58.67,16.7
  Bottom 0.203: v58.67,16.7 59.88,16.57 61.09,18.67 61.09,21.78 61.98,22.8 62.67,22.8 63.18,23.56 63.18,25.46 63.44,25.78 71.5,25.78 72.07,26.29 72.05,29.34 72.5,29.7 72.58,29.72 RADIO1.2
AT_RESET  (via drill 0.25)
  Top 0.254: 49.26,17.63 R15.2 | v58.93,23.3 59.18,23.05 59.75,23.11 64.77,23.11 65.47,22.23 65.47,22.1 66.25,22.1 U1.12
  Top 0.61: ISP.5 49.26,17.63
  Bottom 0.254: v58.93,23.3 56.2,22.35 51.56,16.19 49.26,16.07 ISP.5
F4_CONSOLE_IN
  Top 0.254: U11.38 39.35,41.7 40.58,42.93 NETMFAUX.2
F4_CONSOLE_OUT
  Top 0.254: U11.37 39.85,39.28 41.02,40.45 42.1,40.45 NETMFAUX.3
FROM_STM  (via drill 0.25)
  Top 0.254: U11.58 33.41,25.29 v33.66,25.53 | U1.27 60.47,25.55 v60.58,25.65
  Bottom 0.254: v33.66,25.53 34.29,25.53 34.42,25.4 60.13,25.4 60.26,25.53 60.45,25.53 v60.58,25.65
GND  (via drill 0.25)
  Top 0.203: 56.52,8.51 56.52,9.14 56.45,9.21 53.85,9.21 v51.94,10.41 | 56.45,6.03 56.45,4.13
  other vias: 32.19,31.31 42.74,21.4 53.15,24.13 56.83,26.73 48.77,21.84 38.86,23.56 36.51,27.24 37.02,28.38 25.27,20.07 33.78,23.56 55.75,29.46 61.59,25.72 64.83,23.94 15.81,12.26 18.03,7.68 17.34,5.46 47.05,8.45 30.54,17.78 25.15,23.75 30.92,25.08 28,28.26 46.35,24 73.79,18.35 36.51,41.34 42.55,30.61 34.48,37.08 31.11,40.83 31.11,36.13 33.91,27.18 53.34,34.48 40.96,24.19 25.4,15.18 55.12,15.05 48.77,6.41 52.32,12.57 50.99,17.46 48.77,20.07 39.31,26.29 58.23,18.86 61.4,23.94 67.69,23.5 62.36,16.83 65.28,19.18 74.1,25.78 70.8,19.05 73.85,23.43 70.74,23.24 69.72,27.5 69.28,32.13 64.39,31.37 22.1,17.27 23.88,12.51 23.11,5.65 25.84,5.84 28.26,5.59 30.61,5.46 33.27,4.83 35.69,4.57 38.35,4.38 40.83,4.06 45.85,4.57 33.02,12.26 32.83,14.54 40.83,7.37 28.51,36.07 23.88,44.13 28.57,40.96 28.26,48.83 23.88,36.45 19.75,44.77 11.87,38.04 12.38,45.91 14.99,46.04 8.26,44.45 11.05,41.47 11.81,35.62 3.24,48.32 2.1,31.56 7.37,33.53 3.05,59.94 42.61,37.59 45.59,35.37 54.86,36.77 54.23,43.75 53.21,49.4 47.24,51.56 31.88,48.58 20,54.36 73.34,36.32 67.18,36.96 73.66,45.47 68.33,44.64 75.06,50.48 67.75,28.07 62.87,28.57 58.23,39.62
  pour Bottom: -0.57,70.1 76.71,70.1 76.39,9.65 76.26,9.21 52.32,9.27 52.26,0.19 -0.25,-0.64 -0.57,-0.32
  pour Top: -0.25,70.42 76.45,69.98 76.77,44.39 76.14,9.21 52.51,9.14 52.39,0.06 1.21,0.13 0,3.24
  pour Top: 55.63,9.21 55.56,9.21 55.56,2.03 57.28,2.03 57.28,9.14
  pour Top: 55.69,5.46 55.63,2.1 55.69,2.03 57.28,2.03 57.28,5.46
I2C2_SCL  (via drill 0.25)
  Top 0.203: 47.3,25.79 47.04,26.11 46.86,26.29 46.61,26.67 46.29,27.11 44.83,28.19 44.71,28.26 U11.29
  Top 0.254: 47.3,25.79 R5.2 48.27,25.66 48.9,26.16 50.8,26.16 51.18,25.91 51.18,25.21 U7.6 51.18,25.09 v51.18,23.69 | 61.15,8.45 60.39,9.78 55.44,9.78 53.15,12.06 53.15,19.37 52.58,19.94 52.58,20.38 v51.56,21.02
  Bottom 0.254: v51.56,21.02 51.56,23.3 v51.18,23.69
  pour Top: 60.07,3.3 61.72,3.3 61.72,3.43 61.72,8.76 60.07,8.76
I2C2_SDA  (via drill 0.25)
  Top 0.254: U11.30 44.88,28.79 47.12,27.24 47.51,26.92 R6.2 47.7,27.04 48.13,26.73 51.38,26.72 51.82,26.42 51.82,25.19 U7.5 52.26,24.66 v52.26,23.56
  Bottom 0.254: 56.58,7.87 55.94,9.14 55.69,9.59 47.31,9.59 47.24,9.65 46.16,10.48 46.16,20.83 48.7,24.32 51.94,24.32 v52.26,23.56
  pour Bottom: 55.56,8.89 55.56,3.3 57.28,3.3 57.28,8.89
JSL_HORIZ  (via drill 0.25)
  Top 0.254: U11.24 45.41,25.79 v45.97,26.35
  Bottom 0.305: 62.1,44.2 LFTJS.H2
  Bottom 0.406: v45.97,26.35 45.97,29.97 58.86,42.67 61.4,42.67 62.04,43.43 62.1,44.2
JSL_VERT  (via drill 0.25)
  Top 0.254: U11.25 44.95,26.29 v45.21,26.92
  Bottom 0.406: v45.21,26.92 45.09,30.35 51.31,36.51 51.37,36.58 58.04,43.18 58.04,53.66 58.99,54.8 72.14,54.8 72.45,54.86 LFTJS.V2
JSR_HORIZ  (via drill 0.25)
  Top 0.254: U11.22 42.46,24.79 v40.96,26.61
  Bottom 0.406: RGTJS.H2 13.78,43.5 13.78,39.62 14.29,38.92 17.02,38.92 17.72,38.04 17.72,35.69 18.22,34.99 21.72,34.99 24.07,32.07 36.45,32.07 38.23,30.1 38.23,28 38.99,27.3 40.39,27.3 40.77,26.92 v40.96,26.61
JSR_VERT  (via drill 0.25)
  Top 0.254: U11.23 42.79,25.29 42.61,25.84 v41.97,26.67
  Bottom 0.406: RGTJS.V2 24.57,54.61 25.27,53.59 25.34,33.91 26.35,32.96 31.97,32.92 36.77,32.89 39.05,30.48 39.05,28.45 39.44,28.06 40.83,28.06 v41.97,26.67
LCD_CS  (via drill 0.25)
  Top 0.254: v38.1,18.92 38.29,19.11 38.35,19.3 U11.9
  Bottom 0.254: JP1.6 21.72,8.32 22.54,9.14 37.47,9.14 38.1,9.59 v38.1,18.92
LCD_DAT0  (via drill 0.25)
  Top 0.254: U11.10 38.85,21.7 v38.86,21.72
  Bottom 0.254: v38.86,21.72 38.86,9.14 38.8,9.08 37.97,8.45 24.96,8.45 24.26,7.68 JP1.7
LCD_DAT1  (via drill 0.25)
  Top 0.254: v39.62,18.8 39.5,18.99 39.37,19.3 39.37,19.31 U11.11
  Bottom 0.254: JP1.8 26.8,7.24 27.3,7.87 38.99,7.87 39.62,8.38 v39.62,18.8
LCD_DAT2  (via drill 0.25)
  Top 0.254: U11.14 40.85,19.39 v40.64,18.92
  Bottom 0.254: v40.64,18.92 40.64,8.26 39.5,7.3 29.72,7.3 29.34,6.86 JP1.9
LCD_DAT3  (via drill 0.25)
  Top 0.203: U11.15 41.35,21.79 v41.4,21.84
  Bottom 0.254: JP1.10 31.88,5.97 32.45,6.54 41.21,6.54 41.66,6.92 41.78,21.46 v41.4,21.84
LCD_DAT4  (via drill 0.25)
  Top 0.254: U11.16 42.07,20.29 v42.8,19.94
  Bottom 0.254: v42.8,19.94 42.8,7.11 41.72,5.97 34.99,6.03 34.42,5.4 JP1.11
LCD_DAT5  (via drill 0.25)
  Top 0.254: v43.81,20.83 43.81,22.25 U11.17
  Bottom 0.254: JP1.12 36.96,5.08 37.4,5.46 42.93,5.46 43.81,6.54 v43.81,20.83
LCD_DAT6  (via drill 0.25)
  Top 0.254: v41.97,24.19 42.1,24.07 42.48,23.81 U11.20
  Bottom 0.254: JP1.13 39.5,4.13 40.07,4.89 43.62,4.89 44.58,6.03 44.58,21.34 v41.97,24.19
LCD_DAT7  (via drill 0.25)
  Top 0.254: U11.21 45.06,24.29 v45.21,24.13
  Bottom 0.254: v45.21,24.13 45.34,5.78 44.32,4.32 42.29,4.32 42.04,3.94 JP1.14
LCD_RS  (via drill 0.25)
  Top 0.254: U11.2 34.85,21.54 v34.8,21.59
  Bottom 0.254: v34.8,21.59 36.83,20.7 36.83,10.79 36.07,10.29 21.53,10.29 20.45,9.27 20.45,5.27 20.07,4.76 17.08,4.76 16.57,4.25 JP1.4
LCD_RW  (via drill 0.25)
  Top 0.254: U11.8 37.85,21.59 v38.16,22.42
  Bottom 0.254: v38.16,22.42 37.34,21.14 37.34,10.29 36.58,9.65 21.91,9.65 20.95,8.7 20.95,4.38 20.64,4.06 19.56,4.06 19.11,3.62 JP1.5
LED_DRONE  (via drill 0.25)
  Top 0.254: U11.39 38.85,45.1 37.08,46.86 22.48,46.86 21.21,45.59 21.21,44.01 | v21.21,43.88 21.21,39.38
  Top 0.305: v21.21,43.88 21.21,44.01 | R4.1 21.21,39.38
  Bottom 0.305: v21.21,43.88 22.3,42.79 R17.1
LED_GROUND  (via drill 0.25)
  Top 0.254: 21.72,37.47 22.04,37.78 | 22.04,45.47 22.73,46.29 36.77,46.29 38.35,44.83 U11.40
  Top 0.305: R18.1 21.72,37.47 | 22.04,37.78 22.04,40.7 | 22.04,40.7 22.04,45.47 | v22.99,40.83 22.16,40.83 22.04,40.7
  Bottom 0.305: R16.1 v22.99,40.83
MISO  (via drill 0.25)
  Top 0.254: v58.29,21.08 57.23,21.08 U1.39
  Bottom 0.254: ISP.1 51.28,13.37 57.59,20.57 v58.29,21.08
MOSI  (via drill 0.25)
  Top 0.254: U1.38 56.53,21.57 v56.52,21.59
  Bottom 0.203: 51.24,14.92 48.07,14.99
  Bottom 0.254: v56.52,21.59 51.24,14.92 | 48.07,14.99 47.62,14.73 47.32,14.16 ISP.4
N$1  (via drill 0.25)
  Top 0.254: CHARGE.C 63.37,34.23 v63.44,34.29 | v48.64,29.84 48.67,29.91 IC2.1
  Bottom 0.254: v63.44,34.29 63.44,32.58 61.34,28.64 49.85,28.64 v48.64,29.84
N$2
  Top 0.254: CHARGE.P$1 R2.2
N$4
  Bottom 0.305: AIR.C R17.2
N$5
  Top 0.406: LED_AUX1.C R4.2
N$9
  Top 0.254: POWER.C R1.2
N$10
  Top 0.254: B1.2 68.76,22.19 C16.1
N$11
  Top 0.254: IC2.5 48.17,33.37 46.99,33.34 46.38,33.27 R3.1
N$12
  Bottom 0.305: GROUND.C R16.2
N$14
  Top 0.254: U11.60 29.59,24.29 R9.1 28.83,24.38 TP1.TP
N$15
  Bottom 0.305: R22.2 POWER1.C
N$16
  Top 0.254: U11.6 36.85,18.2 37.34,17.78 37.96,17.72 R10.1
N$17
  Top 0.406: LED_AUX2.C R18.2
N$19
  Top 0.254: U11.47 34.85,33.89 C22.1
N$20
  Top 0.254: U11.31 44.88,29.29 45.21,29.78 44.83,30.61 44.83,31.62 44.69,31.88 C25.1
N$25
  Top 0.203: IC1.4 52.39,29.05 C2.1
N$26
  Top 0.254: U1.22 U1.21 63.47,25.97 C15.1
N$27
  Top 0.203: U1.60 63.47,15.33 63.75,14.8 67.44,14.8 C14.1
N$28
  Top 0.254: B1.1 73.01,20.94 73.28,21.21 73.53,21.21 Y1.SIG
N$29
  Top 0.254: U1.9 67.74,20.57 B1.3
N$30
  Top 0.254: B1.4 67.42,19.7 67.06,20.07 U1.8
N$33
  Top 0.254: U1.57 61.97,13.31 Q1.3 64,13.27 C18.1
N$34
  Top 0.254: C19.1 57.39,11.09 Q1.1 58.24,10.87 60.64,13.14 60.64,14.16 61.02,14.61 61.28,14.61 61.47,14.92 U1.56
N$68
  Top 0.254: SD.8 9.55,27.97 10.79,29.21 R68.2
N$69
  Top 0.254: SD.1 5.51,20.27 6.35,19.43 17.77,19.43 R71.2
N$92
  Top 0.406: USB1.D- 6.57,39.51 R64.1
N$93
  Top 0.406: USB1.D+ 5.78,38.86 6.22,38.42 6.22,37.54 R66.1
OSC32_MHZ_IN
  Top 0.254: C23.1 31.43,16.77 Q3.P$1 31.8,17.44 33.15,18.8 34.92,18.8 35.31,19.18 35.37,19.29 U11.3
OSC32_MHZ_OUT
  Top 0.254: Q3.P$2 35.89,16.7 | 35.89,16.7 C24.1 | U11.4 35.85,17.8 35.89,16.7
PWR_SD_CARD
  Top 0.254: Q21.3 22.39,26.5 22.99,25.91 23.99,25.91 R72.2 | Q21.3 20.94,28.14 C17.1 R68.1 | R71.1 17.78,23.5 | 17.78,23.5 17.78,24.51 19.81,26.54 20.91,26.54 Q21.3 | SD.4 17.7,23.57 17.78,23.5
RESET  (via drill 0.25)
  Top 0.254: U11.7 37.35,26.11 40.2,29.84 v40.39,30.04
  Bottom 0.254: SWD.5 33.91,43.31
  Bottom 0.406: v40.39,30.04 38.86,34.61 35.75,39.69 35.37,40.07 33.91,40.7 33.91,43.31
SCK  (via drill 0.25)
  Top 0.254: v58.17,21.97 58.04,22.1 57.25,22.1 U1.37
  Bottom 0.254: ISP.3 51.05,13.97 56.83,20.77 57.59,21.34 v58.17,21.97
SD_MISO  (via drill 0.25)
  Top 0.203: U11.56 31.37,26.29 30.8,26.54 v27.75,26.54 | SD.7 6.72,26.87 v7.56,26.04
  Bottom 0.203: v7.56,26.04 27.24,26.04 v27.75,26.54
SD_MOSI  (via drill 0.25)
  Top 0.203: SD.3 6.98,22.47 v7.24,22.73 | v30.23,25.78 U11.57
  Bottom 0.203: v7.24,22.73 7.56,22.86 9.46,24.51 28.77,24.51 v30.23,25.78
SD_SCK  (via drill 0.25)
  Top 0.203: U11.55 31.38,26.79 30.73,27.24 v29.02,27.24 | SD.5 8.1,24.67 v8.32,24.45
  Bottom 0.203: v8.32,24.45 8.38,24.57 8.89,25.02 27.81,25.02 29.02,26.42 v29.02,27.24
SW_DOWN  (via drill 0.25)
  Top 0.254: U11.36 40.35,33.5 v40.64,35.24
  Top 0.406: DOWN.4 DOWN.3 34.77,53.33 R19.2
  Bottom 0.406: DOWN.3 36.54,52.62 37.72,51.69 37.66,39.18 40.58,35.31 v40.64,35.24
SW_JSL  (via drill 0.25)
  Top 0.254: U11.28 42.83,27.79 v42.42,28.89
  Top 0.406: R21.2 65.34,67.25 LFTJS.B1A
  Bottom 0.406: v42.42,28.89 49.21,35.62 57.34,43.75 57.34,63.94 58.55,65.15 64.96,65.15 65.53,65.72 65.53,67.18 LFTJS.B1A
SW_JSR  (via drill 0.25)
  Top 0.254: U11.42 37.35,33.9 v36.13,35.81
  Top 0.406: R20.2 v16.28,66.7 RGTJS.B1A
  Bottom 0.406: v16.28,66.7 17.88,66.7 26.1,63.37 26.04,45.4 26.1,39.24 26.54,38.48 33.85,38.48 34.73,38.16 v36.13,35.81
SW_LEFT  (via drill 0.25)
  Top 0.254: U11.33 41.85,33.09 42.74,34.48 42.93,34.67 v43.18,34.67
  Top 0.406: LEFT.4 LEFT.3 45.34,52.92
  Top 0.61: R14.2 46.5,49.81 45.51,51.24 45.44,52.87 LEFT.3
  Bottom 0.406: v43.18,34.67 43.18,35.62 44.7,37.15 44.77,46.61 44.75,46.59 44.83,49.9 45.44,50.38 45.44,52.87
  Bottom 0.61: 45.44,52.87 LEFT.3
SW_RIGHT  (via drill 0.25)
  Top 0.254: v37.27,35.69 37.34,35.56 37.85,34.92 U11.41
  Top 0.406: RIGHT.4 RIGHT.3 27.24,53.05 R12.2
  Bottom 0.406: RIGHT.3 27.32,52.88 27.05,50.61 26.99,39.94 27.43,39.37 27.62,39.18 34.29,39.18 35.24,38.8 v37.27,35.69
SW_SELECT  (via drill 0.25)
  Top 0.254: U11.35 40.83,33.59 41.45,34.91 41.29,35.92
  Top 0.305: 41.29,35.92 v40.96,36.26
  Top 0.406: SELECT.4 SELECT.3 35.52,60.9 34.35,61.59 32.96,62.8 R11.2
  Bottom 0.406: SELECT.3 37.24,60.87 38.42,59.69 38.42,39.37 40.89,36.39 v40.96,36.26
SW_UP  (via drill 0.25)
  Top 0.254: U11.34 41.35,33.41 v42.42,35.37
  Top 0.406: R13.2 33.68,65.58 UP.4 UP.3
  Bottom 0.406: UP.3 40.66,63.59 39.69,62.61 39.69,39.81 41.85,36.32 42.1,35.94 v42.42,35.37
SWCLK
  Top 0.254: U11.49 31.69,29.85
  Top 0.305: 29.91,31.24 29.91,41.59 30.16,42.61 30.16,43.29 SWD.2
  Top 0.406: 31.69,29.85 29.91,31.24
SWDIO  (via drill 0.25)
  Top 0.254: U11.46 35.35,32.68 36.07,33.78 v36.07,34.48
  Top 0.305: v32.32,37.34 32.7,41.6 32.7,43.29 SWD.4
  Bottom 0.406: v32.32,37.34 32.32,34.86 32.77,34.42 v36.07,34.48
TO_STM  (via drill 0.25)
  Top 0.254: U11.59 33.51,24.79 v33.66,24.64 | v60.01,23.94 59.94,24.79 U1.28
  Bottom 0.254: v33.66,24.64 34.04,24.64 34.29,24.89 57.91,24.89 v60.01,23.94
USB_DM  (via drill 0.25)
  Top 0.254: U11.44 36.35,30.71 v36.32,29.91
  Top 0.406: v8.19,41.66 6.93,41.66 R64.2
  Bottom 0.406: v36.32,29.91 35.31,30.54 22.35,30.61 21.97,31.11 21.97,32.45 20.77,33.91 9.97,33.85 8.76,36.2 8.76,41.08 v8.19,41.66
USB_DP  (via drill 0.25)
  Top 0.254: U11.45 35.85,30.9 v35.24,29.27
  Top 0.406: v7.81,35.81 7.81,37.33 R66.2
  Bottom 0.406: v35.24,29.27 35.24,29.34 34.73,29.84 21.97,29.84 21.08,30.92 21.08,32.19 20.32,33.15 9.34,33.08 v7.81,35.81
VBACKBATT  (via drill 0.25)
  Top 0.254: U11.1 31.91,20.29 v31.37,20.51
  Bottom 0.254: 16.64,20.95 15.24,21.14 BAT1.PWR@1
  Bottom 0.406: v31.37,20.51 30.92,20.95 16.64,20.95
VBATT
  Top 0.254: R7.1 49.63,44.39 49.7,44.32
  Top 0.305: 52.39,38.54 52.2,38.73 | 52.52,35.56 52.39,35.69
  Top 0.406: 48.07,67.27 S1.1
  Top 0.61: IC1.3 52.39,35.69 52.39,38.54 | 52.2,38.73 C3.+ 49.7,42.48 49.7,44.32 49.7,50.51 48.07,52.13 48.07,67.27 | IC1.1 54.29,34.99 53.72,35.56 52.52,35.56
VBATT_ADC  (via drill 0.25)
  Top 0.254: U11.27 42.63,27.29 v42.04,27.88 | R8.1 R7.2 46.93,44.49 v46.93,45.97
  Bottom 0.254: v42.04,27.88 41.97,27.88 41.34,28.51 41.34,33.27 41.72,33.66 45.66,33.66 46.93,34.92 v46.93,45.97 46.86,46.04
VBATT_IN  (via drill 0.25)
  Top 0.254: 50.48,30.03 v50.61,29.91
  Top 0.406: 64.32,41.32 C4.+ | 50.1,67.25 S1.2 | 51.63,42.99 51.63,42.86
  Top 0.61: IC2.3 50.48,30.03 | C4.+ 53.11,41.51 51.63,42.99 51.63,64.07 50.1,65.6 50.1,67.25
  Top 0.813: BATT2.P 64.32,41.32 | v61.53,39.94 62.57,41.53 C4.+
  Bottom 0.813: v50.61,29.91 v61.53,39.94
WIFI_RX  (via drill 0.25)
  Top 0.203: v19.94,13.59 19.49,13.59 18.99,14.1 10.48,14.1 9.91,13.53 9.91,12.76 XBEE.2
  Top 0.254: U11.52 31.08,28.29 v30.92,28
  Top 0.305: 9.91,12.76 9.91,13.97 v9.4,14.48
  Bottom 0.203: v30.92,28 31.11,27.75 32.64,25.97 32.64,19.56 32.13,18.86 20.38,18.86 19.94,18.41 v19.94,13.59
  Bottom 0.305: v9.4,14.48 5.27,14.48 4.19,13.4 4.19,11.81 RADIO2.3
WIFI_TX  (via drill 0.25)
  Top 0.203: XBEE.3 13.73,9.72 v13.91,9.91
  Top 0.254: v29.4,28.57 29.77,28.77 U11.51
  Top 0.305: XBEE.3 11.36,9.72 v10.79,10.29
  Bottom 0.203: v13.91,9.91 14.67,10.41 17.72,10.41 18.22,10.99 18.22,18.86 18.73,19.37 31.81,19.37 32.13,19.88 32.13,25.72 29.84,28.07 v29.4,28.57
  Bottom 0.305: v10.79,10.29 5.91,10.29 5.33,10.86 5.33,11.66 RADIO2.2
WIFLY_AP
  Top 0.254: AP.2 22.23,6.35 24,8.13 24,9.66 XBEE.9
XTAL3
  Top 0.254: C20.1 36.85,13.6 Q2.P$1 37.85,16.5 36.51,17.65 36.39,17.78 U11.5
XTAL4
  Top 0.254: R10.2 40.27,16.49 Q2.P$2 43.45,14.61 C21.1

## Text on the board
_tsilk: NiVek / Ground Station | Software Logistics, LLC / Rev B - 12/17/2013 | RX\ | TX | 1 | 1
_bsilk: ON | OFF